# Altium PCB 语音板4次.PcbDoc
Units mm, origin at the board's own origin, x right, y up, seen from the top; angles counter-clockwise.
Board outline 55.01 x 64.53 mm, 2 copper layers (Top Layer, Bottom Layer); 113 components, 89 nets, 362 pads, 78 vias.
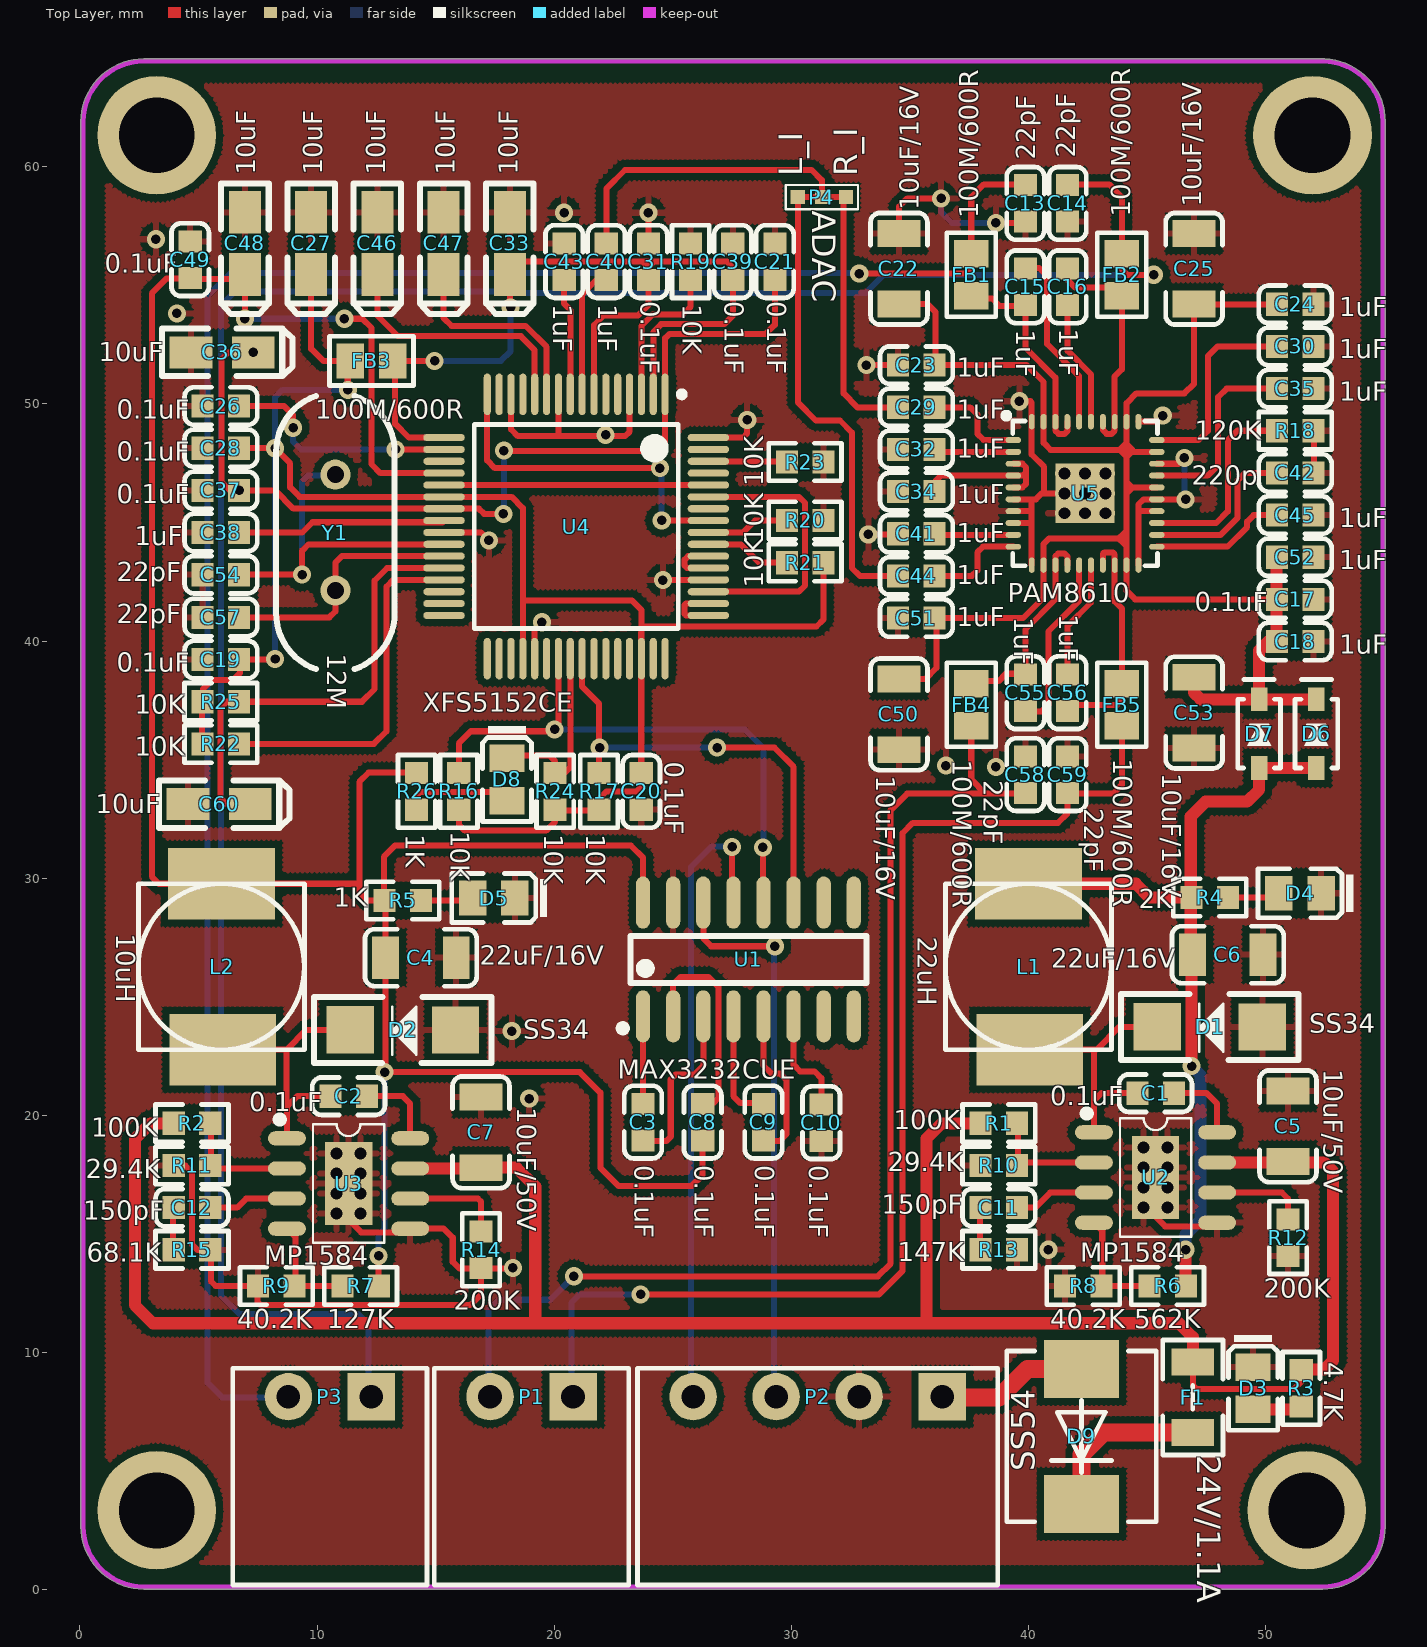
[diagram p0: Top Layer view]
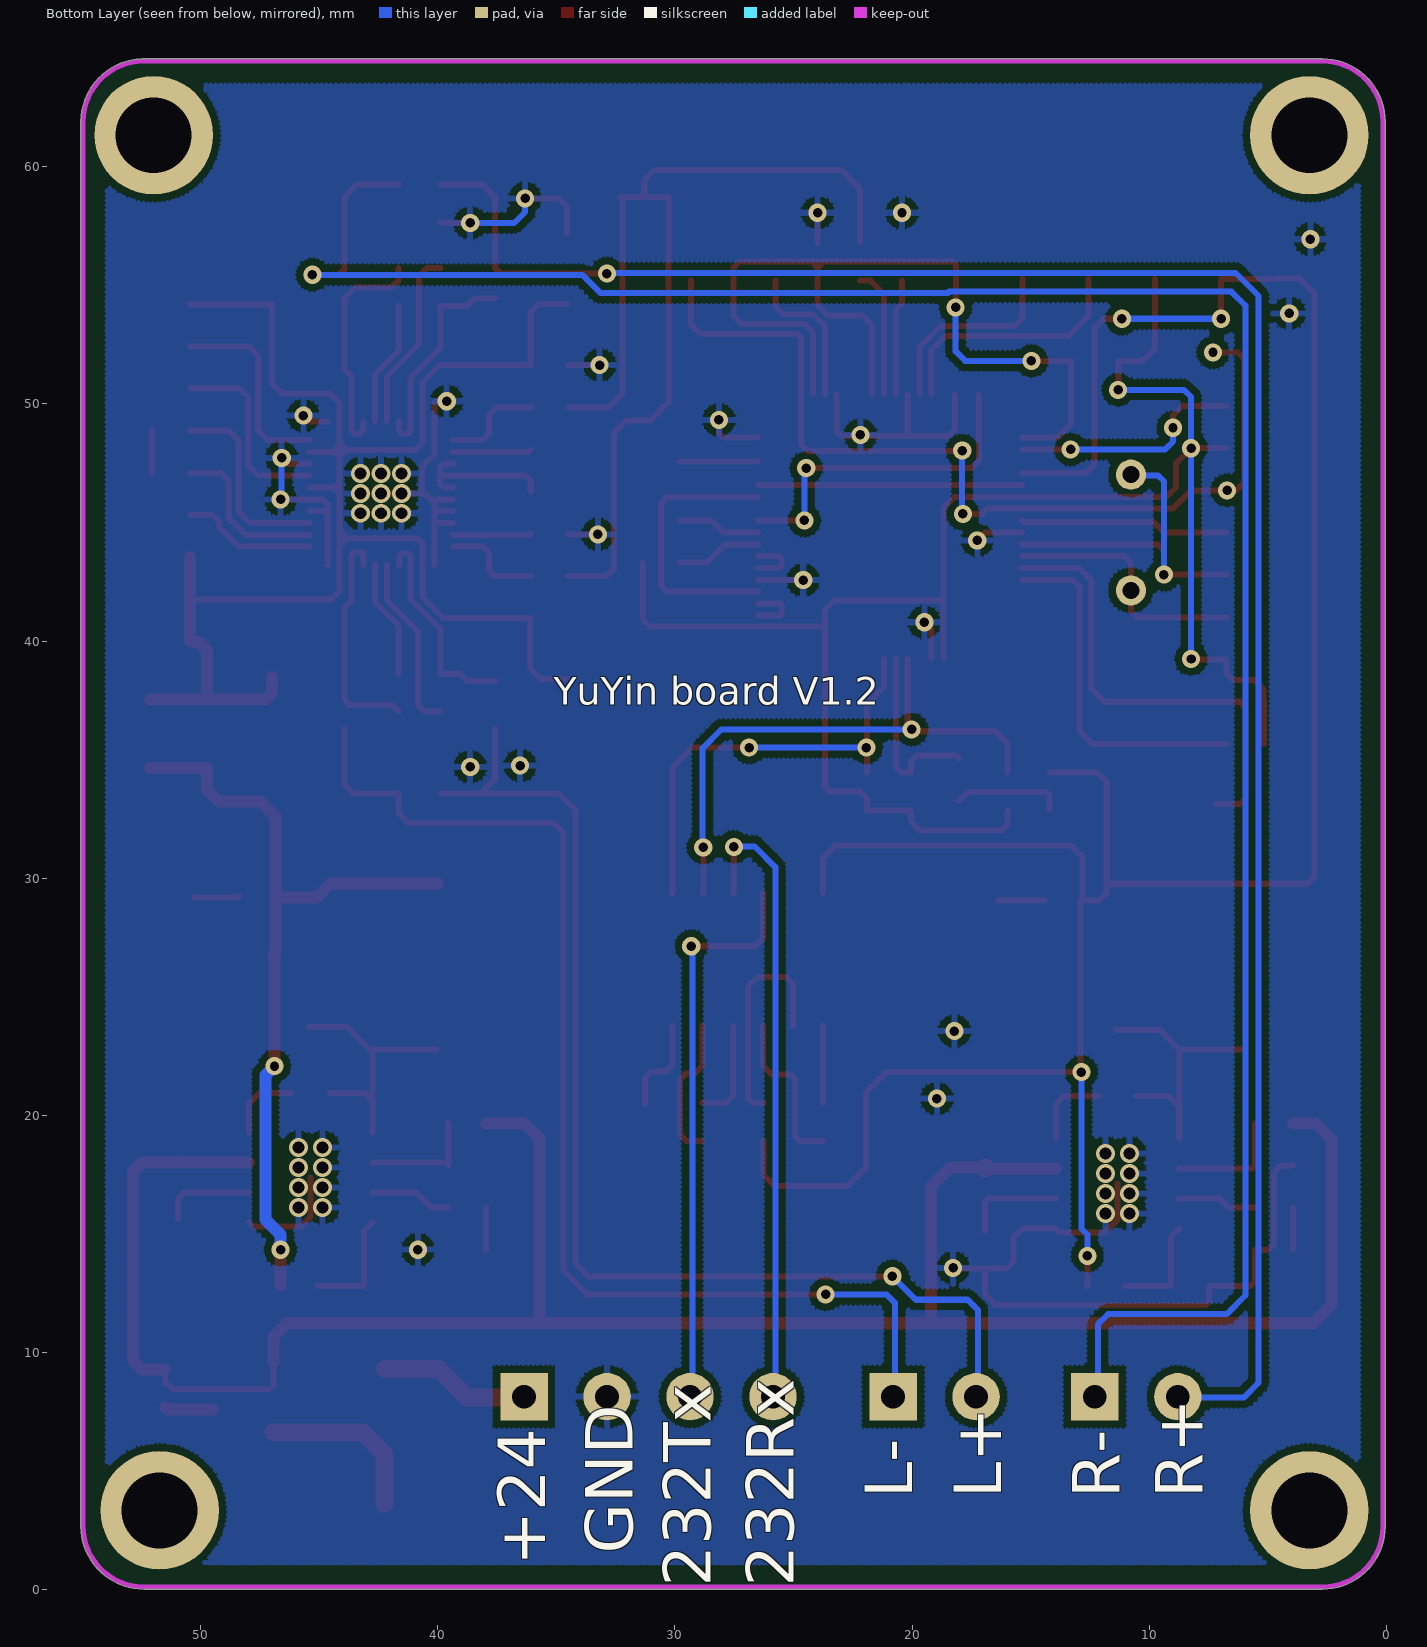
[diagram p1: Bottom Layer view, seen from below]
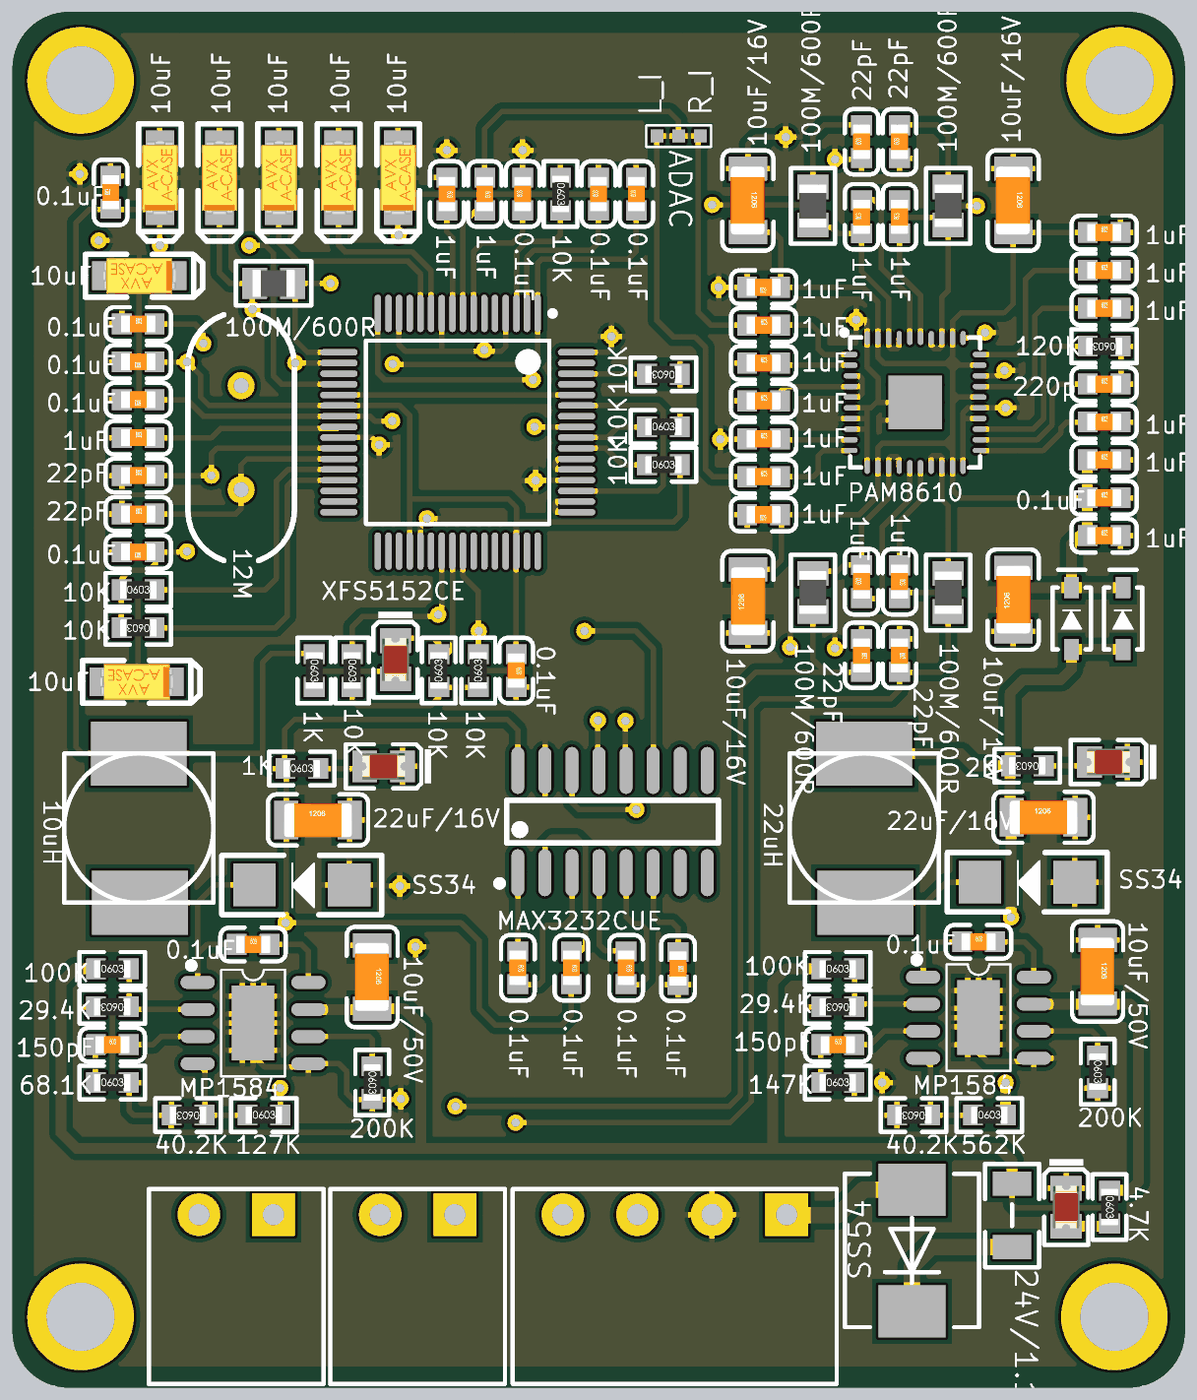
[diagram p2: 3D render of the assembled board from above, using the file's embedded part models]

## Layer stack, top to bottom
Top Layer: signal copper 0.0356
Dielectric: dielectric 0.32, FR-4, Dk 4.8
Bottom Layer: signal copper 0.0356

## Board outline
0.043,2.658 0.043,61.909 cw(c2.683,61.909) 2.683,64.55 52.485,64.55 cw(c52.485,64.449) 52.504,64.548 cw(c52.41,61.909) 55.05,61.909 55.05,2.658 cw(c52.41,2.658) 52.41,0.017 2.683,0.017 cw(c2.683,2.658)

## Design rules (kind name [scope] priority, off if disabled: settings)
Clearance Clearance_1 [InPolygon] p1: gap=0.3
Clearance [All] p2: gap=0.152
HoleSize [All] p1: absolutevalues=TRUE maxlimit=5 minlimit=0.3 maxpercent=80.000 minpercent=20.000
HoleToHoleClearance [All] p1: gap=0.152 allowstackedmicrovias=TRUE
PolygonConnect [All] p1: connectstyle=Relief reliefconductorwidth=0.254 reliefentries=4 polygonreliefangle="90 Angle"
RoutingVias [All] p1: holewidth=0.3 width=0.6 viastyle="Through Hole" minholewidth=0.3 minwidth=0.6 maxholewidth=0.6 maxwidth=1
SilkToSilkClearance [All] p1: silktosilkclearance=0
SilkscreenOverComponentPads [All] p1: minsilkscreentomaskgap=0
SolderMaskExpansion [All] p1: expansion=0.127
Width Width_2 [InNet('VCC12')] p1: maxlimit=1.27 minlimit=0.508 preferedwidth=0.508
Width Width_1 [InNet('VCC24')] p2: maxlimit=1.27 minlimit=0.254 preferedwidth=0.762
Width [All] p3: maxlimit=0.762 minlimit=0.152 preferedwidth=0.254
24 further rules are at their usual default settings.

## Components (designator, comment, footprint, x,y, rotation, side; value= is the part's Value field where it differs from the comment)
C1 "0.1uF" LC-0603_C 45.364,20.93 r0 top
C2 "0.1uF" LC-0603_C 11.328,20.803 r0 top
C3 "0.1uF" LC-0603_C 23.749,19.71 r270 top
C4 "22uF/16V" LC-1206_C 14.376,26.645 r0 top
C5 "10uF/50V" LC-1206_C 50.952,19.533 r270 top
C6 "22uF/16V" LC-1206_C 48.412,26.772 r0 top
C7 "10uF/50V" LC-1206_C 16.916,19.279 r270 top
C8 "0.1uF" LC-0603_C 26.264,19.71 r270 top
C9 "0.1uF" LC-0603_C 28.829,19.71 r270 top
C10 "0.1uF" LC-0603_C 31.267,19.685 r270 top
C11 "150pF" LC-0603_C 38.76,16.104 r0 top
C12 "150pF" LC-0603_C 4.724,16.104 r0 top
C13 "22pF" LC-0603_C 39.878,58.458 r90 top
C14 "22pF" LC-0603_C 41.656,58.458 r90 top
C15 "1uF" LC-0603_C 39.878,54.94 r90 top
C16 "1uF" LC-0603_C 41.656,54.94 r90 top
C17 "0.1uF" LC-0603_C 51.257,41.758 r0 top
C18 "1uF" LC-0603_C 51.257,39.98 r0 top
C19 "0.1uF" LC-0603_C 5.944,39.218 r180 top
C20 "0.1uF" LC-0603_C 23.673,33.655 r270 top
C21 "0.1uF" LC-0603_C 29.312,56.007 r90 top
C22 "10uF/16V" LC-1206_C 34.544,55.702 r270 top
C23 "1uF" LC-0603_C 35.281,51.638 r180 top
C24 "1uF" LC-0603_C 51.257,54.204 r0 top
C25 "10uF/16V" LC-1206_C 46.99,55.702 r270 top
C26 "0.1uF" LC-0603_C 5.944,49.911 r0 top
C27 "10uF" LC-CASE-A_3216 9.754,56.769 r270 top
C28 "0.1uF" LC-0603_C 5.944,48.133 r180 top
C29 "1uF" LC-0603_C 35.281,49.86 r0 top
C30 "1uF" LC-0603_C 51.257,52.426 r0 top
C31 "0.1uF" LC-0603_C 23.978,56.007 r90 top
C32 "1uF" LC-0603_C 35.281,48.082 r0 top
C33 "10uF" LC-CASE-A_3216 18.136,56.769 r270 top
C34 "1uF" LC-0603_C 35.281,46.304 r0 top
C35 "1uF" LC-0603_C 51.257,50.648 r0 top
C36 "10uF" LC-CASE-A_3216 5.994,52.172 r0 top
C37 "0.1uF" LC-0603_C 5.944,46.355 r180 top
C38 "1uF" LC-0603_C 5.944,44.577 r0 top
C39 "0.1uF" LC-0603_C 27.534,56.007 r90 top
C40 "1uF" LC-0603_C 22.2,56.007 r270 top
C41 "1uF" LC-0603_C 35.281,44.526 r0 top
C42 "220p" LC-0603_C 51.257,47.092 r0 top
C43 "1uF" LC-0603_C 20.422,56.007 r270 top
C44 "1uF" LC-0603_C 35.281,42.748 r0 top
C45 "1uF" LC-0603_C 51.257,45.314 r0 top
C46 "10uF" LC-CASE-A_3216 12.548,56.769 r270 top
C47 "10uF" LC-CASE-A_3216 15.342,56.769 r270 top
C48 "10uF" LC-CASE-A_3216 6.96,56.769 r270 top
C49 "0.1uF" LC-0603_C 4.648,56.083 r90 top
C50 "10uF/16V" LC-1206_C 34.544,36.906 r90 top
C51 "1uF" LC-0603_C 35.281,40.97 r180 top
C52 "1uF" LC-0603_C 51.257,43.536 r0 top
C53 "10uF/16V" LC-1206_C 46.99,36.982 r90 top
C54 "22pF" LC-0603_C 5.944,42.799 r0 top
C55 "1uF" LC-0603_C 39.878,37.821 r90 top
C56 "1uF" LC-0603_C 41.656,37.821 r270 top
C57 "22pF" LC-0603_C 5.944,40.996 r0 top
C58 "22pF" LC-0603_C 39.878,34.366 r270 top
C59 "22pF" LC-0603_C 41.656,34.366 r270 top
C60 "10uF" LC-CASE-A_3216 5.867,33.122 r0 top
D1 "SS34" SS34 47.65,23.724 r180 top
D2 "SS34" SS34 13.614,23.597 r180 top
D3 "LED" LC-0805_LED_S1 49.479,8.484 r270 top
D4 "LED" LC-0805_LED_S1 51.46,29.362 r180 top
D5 "LED" LC-0805_LED_S1 17.45,29.159 r180 top
D6 "MBR0530T1G" B3肖特基二极管 52.146,36.093 r270 top
D7 "MBR0530T1G" B3肖特基二极管 49.733,36.093 r270 top
D8 "LED" LC-0805_LED_S1 18.009,34.163 r270 top
D9 "SS54" DIOM6959X26N 42.24,6.452 r90 top
F1 "24V/1.1A" "1206 F" 46.939,8.103 r90 top
FB1 "100M/600R" LC-0805_L 37.592,55.448 r270 top
FB2 "100M/600R" LC-0805_L 43.942,55.448 r90 top
FB3 "100M/600R" LC-0805_L 12.294,51.816 r180 top
FB4 "100M/600R" LC-0805_L 37.592,37.313 r90 top
FB5 "100M/600R" LC-0805_L 43.942,37.313 r270 top
L1 "22uH" 7*7*4MM电感 40.03,26.264 r90 top
L2 "10uH" 7*7*4MM电感 5.994,26.264 r90 top
P1 "" DZ-2-3.5MM 19.047,8.128 r180 top
P2 "" DZ-4-3.5MM 31.112,8.128 r180 top
P3 "" DZ-2-3.5MM 10.538,8.128 r180 top
P4 "" 单刀双掷贴片开关 32.309,58.725 r180 top
R1 "100K" LC-0603_R 38.76,19.66 r0 top
R2 "100K" LC-0603_R 4.724,19.66 r0 top
R3 "4.7K" LC-0603_R 51.511,8.484 r270 top
R4 "2K" LC-0603_R 47.65,29.185 r180 top
R5 "1K" LC-0603_R 13.614,29.058 r0 top
R6 "562K" LC-0603_R 45.872,12.802 r0 top
R7 "127K" LC-0603_R 11.836,12.802 r0 top
R8 "40.2K" LC-0603_R 42.316,12.802 r180 top
R9 "40.2K" LC-0603_R 8.28,12.802 r180 top
R10 "29.4K" LC-0603_R 38.76,17.882 r180 top
R11 "29.4K" LC-0603_R 4.724,17.882 r180 top
R12 "200K" LC-0603_R 50.952,14.834 r270 top
R13 "147K" LC-0603_R 38.76,14.326 r0 top
R14 "200K" LC-0603_R 16.916,14.326 r270 top
R15 "68.1K" LC-0603_R 4.724,14.326 r0 top
R16 "10K" LC-0603_R 15.977,33.655 r270 top
R17 "10K" LC-0603_R 21.895,33.655 r90 top
R18 "120K" LC-0603_R 51.257,48.87 r180 top
R19 "10K" LC-0603_R 25.756,56.007 r270 top
R20 "10K" LC-0603_R 30.582,45.085 r0 top
R21 "10K" LC-0603_R 30.582,43.307 r0 top
R22 "10K" LC-0603_R 5.944,35.662 r180 top
R23 "10K" LC-0603_R 30.582,47.549 r180 top
R24 "10K" LC-0603_R 20.041,33.655 r90 top
R25 "10K" LC-0603_R 5.944,37.44 r0 top
R26 "1K" LC-0603_R 14.199,33.655 r270 top
U1 "MAX3232CUE" LC-SOIC-16_150MIL 28.194,26.568 r0 top
U2 "MP1584" LC-SOIC-8_EP_150MIL 45.364,17.374 r270 top
U3 "MP1584" LC-SOIC-8_EP_150MIL 11.328,17.12 r270 top
U4 "XFS5152CE" "LQFP64 10*10" 20.93,44.831 r270 top
U5 "PAM8610" QFN50P600X600X80-40N 42.393,46.228 r270 top
Y1 "12M" "XTAL 晶振" 10.77,44.577 r270 top

## Footprints (in the part's own frame and the unit in brackets; to place one, negate y for a bottom-side part, rotate by r counter-clockwise, add the part's x,y. Pads: shape width x height; smd on the part's side, far side on the other; paste and mask are expansions set on the pad)
7*7*4MM电感 [mm]
  rect 3x4.5 smd: 1(-3.5,-0.028) 2(3.5,0.028)
  silkscreen extent -3.5,-3.47 3.5,3.53
"1206 F" [mm]
  rect 1.13x1.8 smd: 1(-1.49,0) 2(1.49,0)
  silkscreen extent -2.44,-1.27 2.41,1.27
B3肖特基二极管 [mm] "Molded"
  rect 1x0.7 smd: 1(-1.45,0) 2(1.45,0)
  silkscreen extent -2.29,-0.9 1.45,0.9, body extent -1.42,-0.9 1.43,0.9, height 1.35
DIOM6959X26N [mm] "Molded Diode, 2-Leads, Body 6.9x5.9mm"
  rect 2.45x3.15 smd: 1(-2.85,0) 2(2.85,0)
  silkscreen extent -3.6,-3.15 3.6,3.15, body extent -3.55,-3.11 3.55,3.11, height 2.62
DZ-2-3.5MM [mm]
  rect 2x2 hole 1: 1(-1.75,0)
  round 2 hole 1: 2(1.75,0)
  silkscreen extent -4.1,-1.2 4.1,7.94
DZ-4-3.5MM [mm]
  rect 2x2 hole 1: 1(-5.25,0)
  round 2 hole 1: 2(-1.75,0) 3(1.75,0) 4(5.25,0)
  silkscreen extent -7.6,-1.2 7.6,7.94
LC-0603_C [mm]
  rect 0.93x0.98 smd: 1(-0.77,0) 2(0.77,0)
  silkscreen extent -1.53,-0.79 1.54,0.79, body extent -0.8,-0.4 0.8,0.4, height 0.3
LC-0603_R [mm]
  rect 0.93x0.98 smd: 1(-0.77,0) 2(0.77,0)
  silkscreen extent -1.53,-0.79 1.54,0.79, body extent -0.85,-0.4 0.85,0.4, height 0.56
LC-0805_L [mm]
  rect 1.16x1.47 smd: 1(-0.89,0) 2(0.89,0)
  silkscreen extent -1.77,-1.03 1.77,1.04, body extent -1.02,-0.64 1.03,0.64, height 0.6
LC-0805_LED_S1 [mm]
  rect 1.16x1.47 smd: 1(0.89,0) 2(-0.89,0)
  silkscreen extent -2.24,-1.04 1.77,1.03, body extent -1.01,-0.62 1.01,0.62, height 1.1
LC-1206_C [mm]
  rect 1.13x1.8 smd: 1(1.49,0) 2(-1.49,0)
  silkscreen extent -2.36,-1.2 2.35,1.2, body extent -1.6,-0.81 1.6,0.79, height 1
LC-CASE-A_3216 [mm]
  rect 1.8x1.35 smd: 1(1.31,0) 2(-1.31,0)
  silkscreen extent -2.54,-1 2.97,1, body extent -1.7,-0.84 1.7,0.84, height 1.71
LC-SOIC-8_EP_150MIL [mm]
  rect 3.5x2 smd: 0(0,0)
  oval 0.6x1.6 smd: 1(-1.905,-2.6) 2(-0.635,-2.6) 3(0.635,-2.6) 4(1.905,-2.6) 5(1.905,2.6) 6(0.635,2.6) 7(-0.635,2.6) 8(-1.905,2.6)
  silkscreen extent -2.85,-3.05 2.5,1.5
LC-SOIC-16_150MIL [mm]
  oval 0.6x2.2 smd: 1(-4.445,-2.4) 2(-3.175,-2.4) 3(-1.905,-2.4) 4(-0.635,-2.4) 5(0.635,-2.4) 6(1.905,-2.4) 7(3.175,-2.4) 8(4.445,-2.4) 9(4.445,2.4) 10(3.175,2.4) 11(1.905,2.4) 12(0.635,2.4) 13(-0.635,2.4) 14(-1.905,2.4) 15(-3.175,2.4) 16(-4.445,2.4)
  silkscreen extent -5.45,-3.05 4.97,1
"LQFP64 10*10" [mm]
  oval 1.75x0.3 smd: 1(-5.575,3.75) 2(-5.575,3.25) 3(-5.575,2.75) 4(-5.575,2.25) 5(-5.575,1.75) 6(-5.575,1.25) 7(-5.575,0.75) 8(-5.575,0.25) 9(-5.575,-0.25) 10(-5.575,-0.75) 11(-5.575,-1.25) 12(-5.575,-1.75) 13(-5.575,-2.25) 14(-5.575,-2.75) 15(-5.575,-3.25) 16(-5.575,-3.75) 33(5.575,-3.75) 34(5.575,-3.25) 35(5.575,-2.75) 36(5.575,-2.25) 37(5.575,-1.75) 38(5.575,-1.25) 39(5.575,-0.75) 40(5.575,-0.25) 41(5.575,0.25) 42(5.575,0.75) 43(5.575,1.25) 44(5.575,1.75) 45(5.575,2.25) 46(5.575,2.75) 47(5.575,3.25) 48(5.575,3.75)
  oval 0.3x1.75 smd: 17(-3.75,-5.575) 18(-3.25,-5.575) 19(-2.75,-5.575) 20(-2.25,-5.575) 21(-1.75,-5.575) 22(-1.25,-5.575) 23(-0.75,-5.575) 24(-0.25,-5.575) 25(0.25,-5.575) 26(0.75,-5.575) 27(1.25,-5.575) 28(1.75,-5.575) 29(2.25,-5.575) 30(2.75,-5.575) 31(3.25,-5.575) 32(3.75,-5.575) 49(3.75,5.575) 50(3.25,5.575) 51(2.75,5.575) 52(2.25,5.575) 53(1.75,5.575) 54(1.25,5.575) 55(0.75,5.575) 56(0.25,5.575) 57(-0.25,5.575) 58(-0.75,5.575) 59(-1.25,5.575) 60(-1.75,5.575) 61(-2.25,5.575) 62(-2.75,5.575) 63(-3.25,5.575) 64(-3.75,5.575)
  silkscreen extent -5.7,-4.3 4.3,4.58, body extent -5,-5 5,5, height 1.4
QFN50P600X600X80-40N [mm] "QFN, 40-Leads, Body 6.1x6.1mm (max), Pitch 0."
  rect 2.5x2.5 smd: 0(0,0)
  oval 0.25x0.65 smd: 1(-2.25,-3.025) 2(-1.75,-3.025) 3(-1.25,-3.025) 4(-0.75,-3.025) 5(-0.25,-3.025) 6(0.25,-3.025) 7(0.75,-3.025) 8(1.25,-3.025) 9(1.75,-3.025) 10(2.25,-3.025) 21(2.25,3.025) 22(1.75,3.025) 23(1.25,3.025) 24(0.75,3.025) 25(0.25,3.025) 26(-0.25,3.025) 27(-0.75,3.025) 28(-1.25,3.025) 29(-1.75,3.025) 30(-2.25,3.025)
  oval 0.65x0.25 smd: 11(3.025,-2.25) 12(3.025,-1.75) 13(3.025,-1.25) 14(3.025,-0.75) 15(3.025,-0.25) 16(3.025,0.25) 17(3.025,0.75) 18(3.025,1.25) 19(3.025,1.75) 20(3.025,2.25) 31(-3.025,2.25) 32(-3.025,1.75) 33(-3.025,1.25) 34(-3.025,0.75) 35(-3.025,0.25) 36(-3.025,-0.25) 37(-3.025,-0.75) 38(-3.025,-1.25) 39(-3.025,-1.75) 40(-3.025,-2.25)
  silkscreen extent -3.4,-3.45 3.05,3.05, body extent -3.02,-3.02 3.03,3.03, height 0.8
SS34 [mm]
  rect 2x2 smd: 1(2.222,-0.001) 2(-2.222,0.001)
  silkscreen extent -3.75,-1.39 3.75,1.4
"XTAL 晶振" [mil]
  round 50 hole 28: 1(-96.06,0) 2(96.06,0)
  silkscreen extent -227,-98 227,98
单刀双掷贴片开关 [mm]
  rect 0.6x0.6 smd: 1(0,0) 2(1.016,0) 3(2.032,0)
  silkscreen extent -0.51,-0.51 2.54,0.51

## Part data
C1 C2 C3 C4 C5 C6 C7 C8 C9 C10 C11 C12 C13 C14 C15 C16 C17 C18 C19 C20 C21 C23 C24 C26 C28 C29 C30 C31 C32 C34 C35 C37 C38 C39 C40 C41 C42 C43 C44 C45 C49 C51 C52 C55 C56 C58 C59: library part "Cap Semi", "Capacitor (Semiconductor S"
C22 C25 C50 C53 C54 C57: library part "Cap NP"
C48: library part CAPACITOR
D1 D2: library part "Diode 18TQ045", "Schottky Recti"
D3 D4 D5 D8: library part LED0, "Typical INFRARED"
D6 D7 D9: library part "Diode 18TQ045", "Schottky Rectifier"
F1: library part "Fuse 1"
FB1 FB2 FB3 FB4 FB5: library part Fbead
L1 L2: library part Inductor, "In"
P1 P2 P3: library part Head
R3 R4 R5 R16 R17 R18 R19 R20 R21 R22 R23 R24 R25 R26: library part Res2
U1: library part MAX323
U2 U3: library part M
U4: library part XFS51
U5: library part PAM8610功放芯片
Y1: library part XTAL1

## Free pads (board coordinates)
  round 5 hole 3.2: 0(3.235,3.336) 0(3.235,61.336) 0(51.735,3.336) 0(51.985,61.336)

## Via types
v1: diameter 0.762, hole 0.4, Top Layer to Bottom Layer, 53 vias
v2: diameter 0.8, hole 0.5, Top Layer to Bottom Layer, 25 vias

## Nets (pads, with @x,y where several pads share a name; then routed paths per layer and width w, separated by ;. In a path a pad name is that pad's centre, name@x,y a point inside that pad or via, vN(x,y) a via of type N, cw(c..) or ccw(c..) an arc to the next point about the centre after c; other vN are vias at no path point)
232RX: P2.4 U1.13 | length 26.5
  Top Layer w0.254: v1(27.508,31.318) 27.508,29.413 U1.13@27.559,29.362
  Bottom Layer w0.254: P2.4@25.763,8.103 25.763,30.462 26.645,31.344 v1@27.534,31.344
232TX: P2.3 U1.14 | length 24.1
  Top Layer w0.254: U1.14@26.289,29.362 26.289,27.457 26.619,27.127 v1(29.312,27.127)
  Bottom Layer w0.254: P2.3@29.263,8.103 v1@29.263,27.125
ADAC: C29.1 C40.1 C44.1 P4.1 P4.2 P4.3 | length 44.7
  Top Layer w0.254: C40.1@22.2,56.807 22.2,59.08 22.987,59.868 30.861,59.868 31.293,59.436 P4.2 ; C44.1@34.481,42.748 32.893,42.748 32.563,43.078 32.563,48.793 32.055,49.301 31.039,49.301 30.277,50.063 P4.3 P4.2 ; C29.1@34.481,49.86 32.791,49.86 32.207,50.444 32.207,58.623 P4.1 P4.2
AVCC_12: C17.1 C18.1 C22.1 C23.1 C24.1 C25.1 C50.1 C51.1 C52.1 C53.1 D6.1 D7.1 U5.12 U5.19 U5.26 U5.29 U5.32 U5.39 | length 71.4
  Top Layer w0.254: C50.1 35.653,38.396 36.119,38.862 36.119,40.932 36.081,40.97 39.776,40.97 40.643,41.836 40.643,44.097 40.869,44.323 44.143,44.323 ; C22.1 35.755,54.212 36.081,53.886 36.081,51.638 39.929,51.638 40.643,50.924 40.643,48.359 40.945,48.057 44.143,48.057 ; 43.87,44.268 44.122,44.016 ; 43.87,44.378 44.122,44.63 ; 44.097,48.313 43.853,48.069 44.158,47.765 44.371,47.978 U5.29 ; 44.149,46.707 44.386,46.469 ; 44.149,48.307 44.402,48.054 ; 44.402,46.454 44.386,46.469 ; U5.26 44.395,46.478 44.386,46.469 ; C25.1 46.99,50.851 46.584,50.444 44.552,50.444 44.143,50.035 44.143,48.057 ; C25.1@46.999,54.204 C24.1@50.457,54.204 ; C17.1@50.457,41.758 44.501,41.758 44.143,42.116 44.143,44.323 ; 44.143,44.323 44.143,46.225 ; 44.143,46.225 44.386,46.469 ; 44.143,46.225 44.143,48.057
  Top Layer w0.508: C53.1 46.99,37.821 47.267,37.543 D7.1 ; C52.1@50.457,43.536 50.457,41.758 50.457,39.98 50.114,39.98 49.733,39.599 D7.1 ; D6.1 D7.1
AVDD12: C38.2 U4.24 | length 8.8
  Top Layer w0.254: C38.2@6.744,44.577 9.373,44.577 9.806,45.01 15.284,45.01 U4.24
AVDD33: C31.1 C33.1 C39.1 FB3.1 U4.2 U4.7 U4.17 | length 39.3
  Top Layer w0.254: v1(14.961,51.816) 13.294,51.816 13.294,49.165 13.878,48.581 U4.17 ; v1@18.136,54.102 18.136,55.279 18.136,55.88 18.263,56.007 23.724,56.007 ; U4.7 21.68,53.328 22.073,53.721 23.53,53.721 23.978,54.169 23.978,55.207 23.978,55.753 ; U4.2 24.18,53.034 24.511,53.365 27.178,53.365 27.534,53.721 27.534,55.207 27.534,55.753 27.28,56.007 23.724,56.007 ; 24.232,56.007 23.978,55.753 ; 23.724,56.007 23.978,55.753
  Bottom Layer w0.254: v1(14.961,51.816) 17.755,51.816 18.161,52.222 v1(18.161,54.077)
D0: U4.16 U4.57 | length 14.4
  Top Layer w0.254: U4.16 17.17,50.397 17.17,47.625 17.501,47.295 v1(24.46,47.295) ; v1(24.536,45.085) 26.501,45.085 U4.57
  Bottom Layer w0.254: v1(24.46,47.295) 24.536,47.219 v1(24.536,45.085)
D1: U4.21 U4.60 | length 11.2
  Top Layer w0.254: U4.21 U4.60
D2: U4.49 U4.50 | length 2.4
  Top Layer w0.254: U4.49 25.569,41.081 25.502,41.148 25.502,41.529 25.554,41.581 U4.50
D3: U4.51 U4.59 | length 11.8
  Top Layer w0.254: U4.51 30.321,42.081 30.582,42.342 30.582,45.822 30.322,46.081 U4.59
GND: C4.1 C5.2 C6.1 C7.2 C10.2 C13.1 C14.1 C17.2 C18.2 C19.2 C20.2 C21.2 C22.2 C23.2 C24.2 C25.2 C26.1 C27.2 C28.2 C30.2 C31.2 C32.1 C33.2 C34.1 C35.2 C36.2 C37.2 C38.1 C39.2 C41.1 C42.2 C43.1 C45.2 C46.2 C47.2 C48.2 C49.2 C50.2 C51.2 C52.2 C53.2 C54.1 C57.1 C58.1 C59.1 C60.2 D1.2 D2.2 D3.2 D4.2 D5.2 P2.2 R8.2 R9.2 R10.2 R11.2 R12.2 R13.2 R14.2 R15.2 R18.1 R19.1 R20.2 R23.1 U1.15 U2.0 U2.5 U3.0 U3.5 U4.4 U4.10 U4.14 U4.25 U4.37 U4.52 U4.64 U5.0 U5.6 U5.7 U5.8 U5.11 U5.20 U5.24 U5.25 U5.28 U5.31 U5.40 | length 87.2
  Top Layer w0.254: R11.2@3.924,17.882 4.445,17.882 4.724,17.602 4.724,14.554 4.953,14.326 5.524,14.326 5.524,12.992 5.715,12.802 7.48,12.802 7.48,12.128 7.62,11.989 16.459,11.989 16.916,12.446 R14.2@16.916,13.526 ; U3.0 11.328,15.596 11.862,15.062 13.776,15.062 U3.5 15.342,15.215 15.723,14.834 15.723,13.818 16.015,13.526 R14.2@16.916,13.526 ; U4.25 16.912,44.581 v1(17.247,44.247) ; U4.14 18.18,48.927 18.466,48.641 22.987,48.641 23.18,48.834 U4.4 ; v1(18.263,13.564) 18.225,13.526 R14.2@16.916,13.526 ; U4.37 19.18,40.49 v1(19.482,40.792) ; 20.18,48.641 U4.10 ; C31.2 v1(23.978,58.064) ; v1(24.587,42.57) 24.598,42.581 U4.52 ; U4.64 27.963,48.581 28.143,48.761 v1(28.143,49.327) ; v1(33.172,51.638) C23.2 ; v1(33.249,44.501) 34.485,44.501 C41.1 ; C22.2 34.544,58.318 34.9,58.674 v1(36.322,58.674) ; v1(38.633,57.633) 39.822,57.633 C13.1 ; U5.8 40.143,44.978 ; U5.7 40.143,45.478 ; U5.6 40.314,45.978 ; v1(39.624,50.114) 40.081,50.114 40.143,50.053 40.143,47.868 40.665,47.346 40.665,46.33 40.314,45.978 ; U5.11 40.143,44.978 ; 40.157,45.978 40.143,45.963 40.143,45.478 ; v2(42.393,46.228) 40.564,46.228 40.314,45.978 ; U5.20 44.643,45.466 ; U5.31 45.418,49.253 v1(45.669,49.505) ; U2.0 45.364,15.723 45.771,15.316 47.812,15.316 U2.5 ; U5.24 44.655,45.478 44.643,45.466 ; U5.28 46.335,47.478 v1(46.584,47.727) ; v1(46.634,45.974) 46.63,45.978 44.86,45.978 44.643,45.76 44.643,45.466 ; C42.2@52.057,47.092 R18.1@52.057,48.87 ; 40.143,44.978 40.143,45.478
  Bottom Layer w0.254: v1(36.322,58.674) 36.322,58.09 36.779,57.633 v1(38.633,57.633) ; v1(46.584,47.727) 46.584,46.025 v1(46.634,45.974)
  other v1: 40.843,14.327 18.948,20.701 18.212,23.546 38.633,34.696 36.525,34.747 22.174,48.692 4.089,53.823 3.2,56.947 20.422,58.064
  other v2: 10.82,15.85 11.836,15.85 44.856,16.104 45.872,16.104 10.82,16.696 11.836,16.696 44.856,16.95 45.872,16.95 10.82,17.543 11.836,17.543 44.856,17.797 45.872,17.797 10.82,18.39 11.836,18.39 44.856,18.644 45.872,18.644 41.529,45.39 42.393,45.39 43.256,45.39 41.529,46.228 43.256,46.228 41.529,47.066 42.393,47.066 43.256,47.066
I_VCC24: D9.2 P2.1 | length 6.5
  Top Layer w0.762: P2.1@36.263,8.103 38.76,8.103 39.959,9.302 D9.2
IIC_SCL: U4.47
IIC_SDA: U4.48
MIC_BIAS: C46.1 U4.12 | length 10.7
  Top Layer w0.254: C46.1@12.548,55.279 12.548,53.721 13.411,52.857 18.593,52.857 19.18,52.271 U4.12
MIC_N: U4.13
MIC_P: U4.15
NetC1_1: C1.1 D1.1 L1.1 U2.1 | length 11.2
  Top Layer w0.254: L1.1 42.88,22.764 43.841,23.725 D1.1 ; U2.1 42.764,20.616 ; 42.764,22.764 42.764,20.616 ; C1.1@44.564,20.93 43.078,20.93 42.764,20.616
NetC1_2: C1.2 U2.8 | length 3.2
  Top Layer w0.254: C1.2@46.164,20.93 47.523,20.93 47.964,20.489 U2.8
NetC2_1: C2.1 D2.1 L2.1 U3.1 | length 11.4
  Top Layer w0.254: L2.1 8.717,22.764 ; U3.1 8.728,20.362 ; C2.1@10.528,20.803 9.169,20.803 8.728,20.362 ; D2.1 9.551,23.598 8.717,22.764 ; 8.717,22.764 8.717,20.373 8.728,20.362
NetC2_2: C2.2 U3.8 | length 3.4
  Top Layer w0.254: C2.2@12.128,20.803 13.614,20.803 13.928,20.489 U3.8
NetC3_1: C3.1 U1.1 | length 3.3
  Top Layer w0.254: C3.1@23.749,20.51 U1.1@23.749,23.774
NetC3_2: C3.2 U1.3 | length 7
  Top Layer w0.254: C3.2@23.749,18.91 24.727,18.91 24.917,19.101 24.917,21.514 25.121,21.717 25.908,21.717 26.289,22.098 U1.3@26.289,23.774
NetC8_1: C8.1 U1.2 | length 9.4
  Top Layer w0.254: U1.2@25.019,23.774 25.019,25.527 25.324,25.832 26.518,25.832 26.924,25.425 26.924,20.726 26.708,20.51 C8.1@26.264,20.51
NetC9_1: C9.1 U1.4 | length 4.4
  Top Layer w0.254: U1.4@27.559,23.774 27.559,20.803 27.851,20.51 C9.1@28.829,20.51
NetC9_2: C9.2 U1.5 | length 6.3
  Top Layer w0.254: C9.2@28.829,18.91 29.502,18.91 29.794,19.202 29.794,21.488 29.515,21.768 29.159,21.768 28.829,22.098 U1.5@28.829,23.774
NetC10_1: C10.1 U1.6 | length 4.1
  Top Layer w0.254: U1.6@30.099,23.774 30.099,22.123 30.378,21.844 30.988,21.844 31.267,21.565 C10.1@31.267,20.485
NetC11_1: C11.1 R13.1 | length 1.8
  Top Layer w0.254: R13.1@37.96,14.326 C11.1@37.96,16.104
NetC11_2: C11.2 U2.3 | length 3.5
  Top Layer w0.254: C11.2@39.56,16.104 40.284,16.104 40.919,16.739 U2.3
NetC12_1: C12.1 R15.1 | length 1.8
  Top Layer w0.254: R15.1@3.924,14.326 C12.1@3.924,16.104
NetC12_2: C12.2 U3.3 | length 3.4
  Top Layer w0.254: C12.2@5.524,16.104 6.629,16.104 7.01,16.485 U3.3
NetC15_1: C15.1 FB1.2 U5.37 U5.38 | length 9.2
  Top Layer w0.254: FB1.2@37.592,54.448 38.465,54.448 38.773,54.14 39.878,54.14 39.878,52.375 41.143,51.11 U5.38 41.143,48.875 41.275,48.743 41.529,48.743 41.643,48.856 U5.37
NetC15_2: C15.2 U5.36 | length 7.8
  Top Layer w0.254: C15.2@39.878,55.74 40.45,55.74 40.792,55.397 40.792,52.527 42.143,51.177 U5.36
NetC16_1: C16.1 U5.35 | length 5.3
  Top Layer w0.254: C16.1@41.656,54.14 41.656,52.238 42.643,51.252 U5.35
NetC16_2: C16.2 FB2.1 U5.33 U5.34 | length 9.8
  Top Layer w0.254: C16.2@41.656,55.74 41.656,55.22 41.961,54.915 43.475,54.915 43.942,54.448 43.942,51.46 43.643,51.161 43.643,48.875 43.51,48.743 43.307,48.743 43.143,48.907 U5.34
NetC26_2: C26.2 U4.18 | length 10
  Top Layer w0.254: C26.2@6.744,49.911 8.611,49.911 8.992,49.53 v1(8.992,48.997) ; v1(13.31,48.082) U4.18 U4.18
  Bottom Layer w0.254: v1(8.992,48.997) 8.992,48.412 9.322,48.082 v1(13.31,48.082)
NetC29_2: C29.2 U5.1 | length 4.3
  Top Layer w0.254: C29.2@36.081,49.86 37.541,49.86 37.846,49.555 37.846,48.743 38.111,48.478 U5.1
NetC30_1: C30.1 U5.30 | length 8.5
  Top Layer w0.254: U5.30 47.183,48.478 47.574,48.87 47.574,52.019 47.981,52.426 C30.1@50.457,52.426
NetC32_2: C32.2 U5.2 | length 3.3
  Top Layer w0.254: C32.2@36.081,48.082 36.185,47.978 U5.2
NetC34_2: C34.2 U5.3 U5.4 U5.5 | length 6.3
  Top Layer w0.254: C34.2@36.081,46.304 36.081,46.749 36.31,46.978 U5.4 39.764,46.978 39.903,47.117 ; U5.5 39.747,46.478 39.903,46.634 39.903,47.117 ; U5.3 39.746,47.478 39.903,47.32 39.903,47.117
NetC35_1: C35.1 U5.27 | length 8.2
  Top Layer w0.254: U5.27 47.562,46.978 48.006,47.422 48.006,50.292 48.362,50.648 C35.1@50.457,50.648
NetC40_2: C40.2 U4.8 | length 5.5
  Top Layer w0.254: U4.8 21.18,54.631 21.755,55.207 C40.2@22.2,55.207
NetC41_2: C41.2 U5.9 | length 3.3
  Top Layer w0.254: C41.2@36.081,44.526 36.129,44.478 U5.9
NetC42_1: C42.1 U5.22 | length 7
  Top Layer w0.254: U5.22 48.11,44.478 48.819,45.187 48.819,46.761 49.149,47.092 C42.1@50.457,47.092
NetC43_2: C43.2 U4.9 | length 4.9
  Top Layer w0.254: C43.2@20.422,55.207 20.422,54.229 20.68,53.971 U4.9
NetC44_2: C44.2 U5.10 | length 4.2
  Top Layer w0.254: C44.2@36.081,42.748 37.617,42.748 37.846,42.977 37.846,43.739 38.085,43.978 U5.10
NetC45_1: C45.1 U5.21 | length 5.7
  Top Layer w0.254: U5.21 48.398,43.978 49.225,44.806 49.225,45.034 49.505,45.314 C45.1@50.457,45.314
NetC47_1: C47.1 U4.11 | length 8.5
  Top Layer w0.254: C47.1@15.342,55.279 15.342,53.619 15.672,53.289 18.796,53.289 19.68,52.406 U4.11
NetC54_2: C54.2 U4.26 Y1.1 | length 15.2
  Top Layer w0.254: C54.2@6.744,42.799 v1(9.373,42.799) 9.373,43.815 9.639,44.081 U4.26
  Bottom Layer w0.254: v1(9.373,42.799) 9.373,46.736 9.627,46.99 10.743,46.99 Y1.1
NetC55_1: C55.1 U5.15 | length 7.5
  Top Layer w0.254: C55.1@39.878,37.021 40.551,37.021 40.843,37.313 40.843,40.402 42.143,41.701 U5.15
NetC55_2: C55.2 FB4.2 U5.13 U5.14 | length 8.9
  Top Layer w0.254: FB4.2@37.592,38.313 38.744,38.313 39.052,38.621 39.878,38.621 39.878,40.488 41.143,41.752 U5.13 41.143,43.581 41.25,43.688 41.529,43.688 41.643,43.574 U5.14
NetC56_1: C56.1 U5.16 | length 5
  Top Layer w0.254: C56.1@41.656,38.621 41.656,40.64 42.643,41.627 U5.16
NetC56_2: C56.2 FB5.1 U5.17 U5.18 | length 9.8
  Top Layer w0.254: C56.2@41.656,37.021 41.948,37.313 43.739,37.313 43.942,37.516 43.942,41.377 43.643,41.676 43.643,43.657 43.561,43.739 43.205,43.739 43.143,43.676 U5.17
NetC57_2: C57.2 U4.27 Y1.2 | length 10.9
  Top Layer w0.254: C57.2@6.772,40.967 6.744,40.996 10.517,40.996 10.77,41.248 Y1.2 10.77,43.307 11.044,43.581 U4.27
NetD3_1: D3.1 R3.2 | length 2.1
  Top Layer w0.508: D3.1 51.421,7.594 R3.2@51.511,7.684
NetD4_1: D4.1 R4.1 | length 1.9
  Top Layer w0.254: R4.1@48.396,29.239 48.45,29.185 D4.1@50.283,29.185
NetD5_1: D5.1 R5.2 | length 1.9
  Top Layer w0.254: R5.2@14.414,29.058 D5.1@16.348,29.058
NetD8_1: D8.1 R26.2 | length 4.6
  Top Layer w0.254: R26.2 14.199,33.503 14.325,33.629 17.652,33.629 D8.1
NetD9_1: D9.1 F1.1 | length 7.2
  Top Layer w0.762: D9.1 42.24,5.69 43.163,6.613 F1.1
NetR1_2: R1.2 R10.1 U2.2 | length 5
  Top Layer w0.254: R1.2@39.56,19.66 39.56,17.882 39.687,18.009 U2.2
NetR2_2: R2.2 R11.1 U3.2 | length 5
  Top Layer w0.254: R2.2@5.524,19.66 5.524,17.882 5.651,17.755 U3.2
NetR6_1: R6.1 R8.1 U2.4 | length 4.8
  Top Layer w0.254: U2.4 43.116,15.117 43.116,12.802 R6.1@45.072,12.802
NetR7_1: R7.1 R9.1 U3.4 | length 4.5
  Top Layer w0.254: U3.4 9.08,14.863 9.08,12.802 R7.1@11.036,12.802
NetR12_1: R12.1 U2.6 | length 3.9
  Top Layer w0.254: U2.6 50.698,16.739 50.952,16.485 R12.1@50.952,15.634
NetR14_1: R14.1 U3.6 | length 4.3
  Top Layer w0.254: U3.6 16.789,16.485 16.916,16.358 R14.1@16.916,15.126
NetR18_2: R18.2 U5.23 | length 8.4
  Top Layer w0.254: U5.23 47.924,44.978 48.412,45.466 48.412,48.463 48.819,48.87 R18.2@50.457,48.87
NetR19_2: R19.2 U4.3 | length 6.4
  Top Layer w0.254: U4.3 23.68,53.296 24.155,53.772 25.425,53.772 25.756,54.102 R19.2@25.756,55.207
NetR20_1: R20.1 U4.56 | length 3.5
  Top Layer w0.254: U4.56@26.509,44.577 U4.56 27.969,44.581 28.473,45.085 R20.1
NetR21_1: R21.1 U4.55 | length 3.6
  Top Layer w0.254: U4.55 27.877,44.081 28.651,43.307 R21.1
NetR22_1: R22.1 U4.29 | length 15
  Top Layer w0.254: R22.1@6.744,35.662 12.395,35.662 12.929,36.195 12.929,42.291 13.219,42.581 U4.29
NetR23_2: R23.2 U4.62 | length 3.3
  Top Layer w0.254: U4.62@26.511,47.574 U4.62 29.779,47.581 R23.2
NetU4_53: U4.53 U4.54 | length 2.4
  Top Layer w0.254: U4.53 25.601,43.081 25.502,43.18 25.502,43.434 25.649,43.581 U4.54
RDY: D8.2 R24.2 U4.40 | length 8
  Top Layer w0.254: D8.2 18.119,35.163 19.803,35.163 20.041,34.925 20.041,34.455 20.46,34.455 20.68,34.675 U4.40
RESET: C60.1 R25.2 U4.28 | length 19.7
  Top Layer w0.254: R25.2@6.731,37.44 6.185,37.44 5.931,37.186 5.931,33.363 6.172,33.122 C60.1 ; R25.2@6.744,37.44 11.887,37.44 12.421,37.973 12.421,42.545 12.957,43.081 U4.28
RXD: R16.1 U1.12 U4.39 | length 23.8
  Top Layer w0.254: R16.1@15.977,34.455 15.977,35.687 16.485,36.195 19.914,36.195 20.18,36.461 U4.39 ; v1(28.804,31.293) 28.804,29.388 U1.12@28.829,29.362
  Bottom Layer w0.254: v1(20.015,36.271) 28.042,36.271 28.829,35.484 v1@28.829,31.293
SPEEKL+: C59.2 FB5.2 P1.1 | length 49.9
  Top Layer w0.254: v1(23.647,12.446) 33.706,12.446 34.696,13.437 34.696,31.902 35.128,32.334 41.25,32.334 41.656,32.741 41.656,33.566 43.574,33.566 43.942,33.934 FB5.2@43.942,36.313
  Bottom Layer w0.254: P1.1@20.724,8.103 20.724,12.088 21.082,12.446 v1(23.647,12.446)
SPEEKL-: C58.2 FB4.1 P1.2 | length 49.6
  Top Layer w0.254: v1(20.828,13.208) 33.655,13.208 34.188,13.741 34.188,32.868 34.887,33.566 38.189,33.566 ; FB4.1@37.592,36.313 37.592,34.163 38.189,33.566 ; C58.2@39.878,33.566 38.189,33.566
  Bottom Layer w0.254: P1.2@17.224,8.103 17.224,11.788 17.653,12.217 19.837,12.217 v1(20.828,13.208)
SPEEKR+: C14.2 FB2.2 P3.1 | length 98.5
  Top Layer w0.254: C14.2@41.656,59.258 43.409,59.258 43.942,58.725 43.942,56.448 43.942,55.677 44.171,55.448 v1(45.288,55.448)
  Bottom Layer w0.254: P3.1@12.164,8.103 12.164,11.179 11.735,11.608 6.731,11.608 5.944,12.395 5.944,54.153 6.528,54.737 18.435,54.737 18.485,54.686 33.147,54.686 33.909,55.448 v1(45.288,55.448)
SPEEKR-: C13.2 FB1.1 P3.2 | length 87.6
  Top Layer w0.254: v1(32.868,55.499) 37.338,55.499 37.592,55.753 37.592,56.448 37.592,58.725 38.125,59.258 C13.2@39.878,59.258
  Bottom Layer w0.254: P3.2@8.689,8.103 5.994,8.103 5.385,8.712 5.385,9.931 5.385,54.559 6.35,55.524 32.842,55.524 v1(32.868,55.499)
SPI_CLK: U4.42
SPI_CS: U4.43
SPI_MISO: U4.45
SPI_MOSI: U4.44
TXD: R17.2 U1.11 U4.41 | length 18.9
  Top Layer w0.254: U4.41 21.18,38.079 21.895,37.363 R17.2@21.895,34.455 ; v1(26.873,35.509) 29.286,35.509 30.099,34.696 U1.11@30.099,29.362
  Bottom Layer w0.254: v1(21.92,35.509) v1(26.873,35.509)
VCC3.3: C4.2 C8.2 C48.1 C49.1 L2.2 R5.1 R7.2 R26.1 U1.16 U4.20 | length 112.1
  Top Layer w0.254: v1(6.96,53.594) 6.96,55.279 4.652,55.279 4.648,55.283 3.645,55.283 3.028,54.666 3.028,30.063 3.327,29.764 L2.2 11.786,29.764 ; v1(11.151,53.594) 11.913,53.594 12.294,53.213 12.294,47.458 12.67,47.081 U4.20 ; v1(12.598,14.072) 12.598,12.84 R7.2@12.636,12.802 ; R5.1@12.886,28.986 12.886,21.853 v1(12.852,21.819) 21.082,21.819 21.946,20.955 21.946,17.78 22.708,17.018 25.806,17.018 26.264,17.475 C8.2@26.264,18.91 ; R26.1@14.199,34.455 12.179,34.455 11.786,34.061 11.786,29.388 12.116,29.058 12.814,29.058 12.814,30.899 13.284,31.369 23.241,31.369 23.749,30.861 U1.16@23.749,29.362
  Bottom Layer w0.254: v1(6.96,53.594) v1(11.151,53.594) ; v1(12.598,14.072) 12.598,14.961 12.852,15.215 v1(12.852,21.819)
VCC12: C6.2 D6.2 D7.2 L1.2 R4.2 R6.2 | length 34
  Top Layer w0.508: L1.2 44.531,29.764 45.11,29.185 R4.2@46.85,29.185 ; R6.2@46.634,12.84 v1(46.634,14.326) ; v1(46.888,22.073) C6.2@46.888,26.806 ; C6.2 C6.2@46.888,26.806 ; D6.2 D7.2 49.733,33.731 49.225,33.223 47.473,33.223 46.85,32.601 R4.2@46.85,29.185 ; R4.2@46.85,29.185 46.85,26.844 C6.2@46.888,26.806
  Bottom Layer w0.508: v1(46.634,14.326) 46.634,14.961 47.269,15.596 47.269,21.692 v1(46.888,22.073)
VCC24: C5.1 C7.1 F1.2 R1.1 R2.1 R3.1 U2.7 U3.7 | length 97.8
  Top Layer w0.254: U3.7 U3.7@13.962,17.789 ; F1.2 46.939,8.611 47.092,8.458 51.206,8.458 51.511,8.763 R3.1@51.511,9.284
  Top Layer w0.508: R2.1@3.924,19.66 2.972,19.66 2.311,18.999 2.311,11.989 3.073,11.227 19.202,11.227 ; U3.7 16.882,17.755 C7.1 18.406,17.789 19.202,16.993 19.202,11.227 ; R1.1@37.96,19.66 36.347,19.66 35.712,19.025 35.712,11.227 ; F1.2 46.939,10.643 46.355,11.227 35.712,11.227 ; U2.7 C5.1@50.918,18.009 ; C5.1 C5.1@50.918,18.009 ; R3.1@51.511,9.284 52.489,9.284 52.857,9.652 52.857,17.628 52.476,18.009 C5.1@50.918,18.009 ; 19.202,11.227 35.712,11.227
  Top Layer w0.762: C7.1 C7.1@16.95,17.755
VDD12: C21.1 C36.1 C37.1 U4.1 U4.23 | length 39.9
  Top Layer w0.254: v1(7.304,52.172) 6.248,52.172 5.969,51.892 5.969,46.711 6.325,46.355 8.23,46.355 9.004,45.581 U4.23 16.827,45.581 17.043,45.364 v1(17.856,45.364) ; v1@17.831,48.006 24.384,48.006 24.68,48.302 U4.1 24.68,52.772 24.867,52.959 28.931,52.959 29.312,53.34 C21.1@29.312,55.207
  Bottom Layer w0.254: v1(17.856,45.364) 17.882,45.39 v1(17.882,48.031)
  other v1: 6.714,46.355
VDD33: C19.1 C20.1 C27.1 C28.1 FB3.2 R16.2 R17.1 R21.2 R22.2 R24.1 R25.1 U4.22 U4.36 U4.46 | length 80
  Top Layer w0.254: R22.2@5.144,35.662 5.144,37.44 5.182,37.478 5.182,37.973 5.563,38.354 6.452,38.354 6.744,38.646 6.744,39.218 8.204,39.218 v1(8.23,39.243) ; C28.1@6.744,48.133 v1(8.23,48.133) 8.865,47.498 8.865,46.482 9.266,46.081 U4.22 18.206,46.081 18.68,45.608 18.68,41.707 ; C27.1@9.754,55.279 9.754,52.324 10.262,51.816 11.294,51.816 v1@11.294,50.606 ; R16.2@15.977,32.855 15.977,32.258 16.231,32.004 19.66,32.004 20.041,32.385 20.041,32.855 21.895,32.855 21.895,33.35 22.2,33.655 23.47,33.655 23.673,33.858 U4.46@23.673,39.249 ; U4.36 18.68,41.707 ; 23.68,40.615 31.064,40.615 31.352,40.902 R21.2 ; 18.68,41.707 23.292,41.707 23.68,41.319 23.68,40.367 ; U4.46@23.673,39.249 U4.46 23.68,40.367 ; U4.46@23.673,39.249 23.673,40.361 23.68,40.367
  Bottom Layer w0.254: v1(8.23,39.243) v1(8.23,48.133) 8.23,50.292 8.534,50.597 v1(11.303,50.597)
pads on no net: U1.7 U1.8 U1.9 U1.10 U4.5 U4.6 U4.19 U4.30 U4.31 U4.32 U4.33 U4.34 U4.35 U4.38 U4.58 U4.61 U4.63

## Polygon pours and split planes (outlines as drawn)
GND on Bottom Layer "Bottom Layer-No Net 1" (hatched 90Degree grid 0.203 track 0.203, remove dead copper, pour order 3): 3.683,63.449 51.41,63.449 cw(c51.41,60.909) 53.95,60.909 53.95,3.658 cw(c51.41,3.658) 51.41,1.118 51.333,1.118 3.683,1.118 cw(c3.683,3.658) 1.143,3.658 1.143,60.909 cw(c3.683,60.909) 3.683,63.449 3.759,63.449
GND on Top Layer "Bottom Layer-No Net 1" (hatched 90Degree grid 0.203 track 0.203, remove dead copper, pour order 4): 3.683,63.449 51.41,63.449 cw(c51.41,60.909) 53.95,60.909 53.95,3.658 cw(c51.41,3.658) 51.41,1.118 51.333,1.118 3.683,1.118 cw(c3.683,3.658) 1.143,3.658 1.143,60.909 cw(c3.683,60.909) 3.683,63.449 3.759,63.449

## Keep-outs
Keep-Out Layer:
  lines w0.2: 52.41,64.449 cw(c52.41,61.909) 54.95,61.909 54.95,2.658 cw(c52.41,2.658) 52.41,0.118 2.683,0.118 cw(c2.683,2.658) 0.143,2.658 0.143,61.909 cw(c2.683,61.909) 2.683,64.449 52.485,64.449

## Silkscreen, mask and mechanical layers (free items; w line width, h text height)
Top Overlay:
  text "L_I" at 30.455,59.614 h1 r90
  text "R_I" at 32.791,59.614 h1 r90
  text "ADAC" at 30.886,58.141 h1 r270
Bottom Overlay:
  text "YuYin board V1.2" at 35.103,36.906 h2
  text "R+" at 7.735,3.836 h2 r270
  text "R-" at 11.235,3.836 h2 r270
  text "L+" at 16.235,3.836 h2 r270
  text "L-" at 19.985,3.836 h2 r270
  text "GND" at 31.775,1.499 h2 r270
  text "+24" at 35.458,0.991 h2 r270
  text "232Rx" at 24.985,0.118 h2 r270
  text "232Tx" at 28.485,0.118 h2 r270